# Altium PCB Pot_Rat.PcbDoc
Units mm, origin at the board's own origin, x right, y up, seen from the top; angles counter-clockwise.
Board outline 42.53 x 50.21 mm, 2 copper layers (Top Layer, Bottom Layer); 37 components, 18 nets, 134 pads, 64 vias.
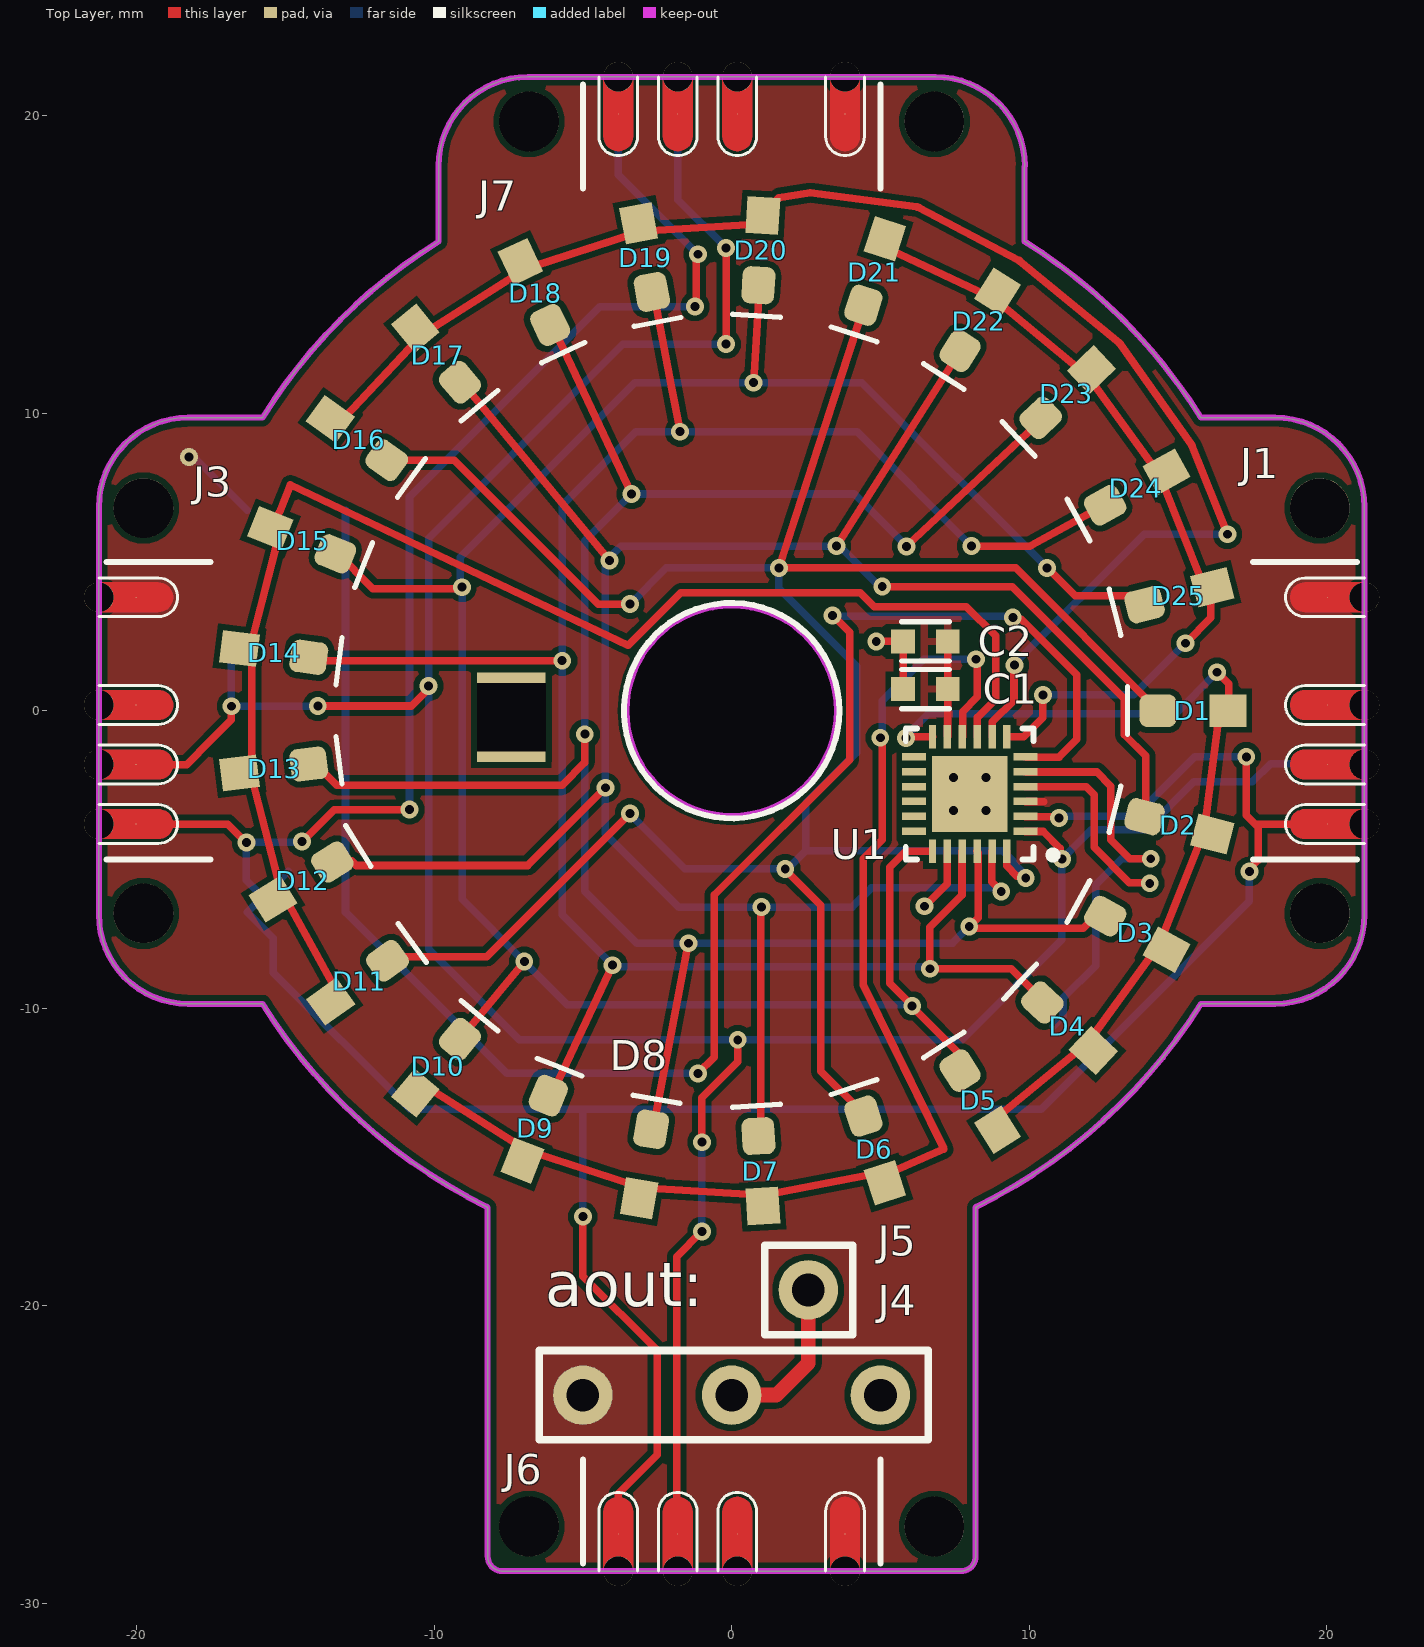
[diagram p0: Top Layer view]
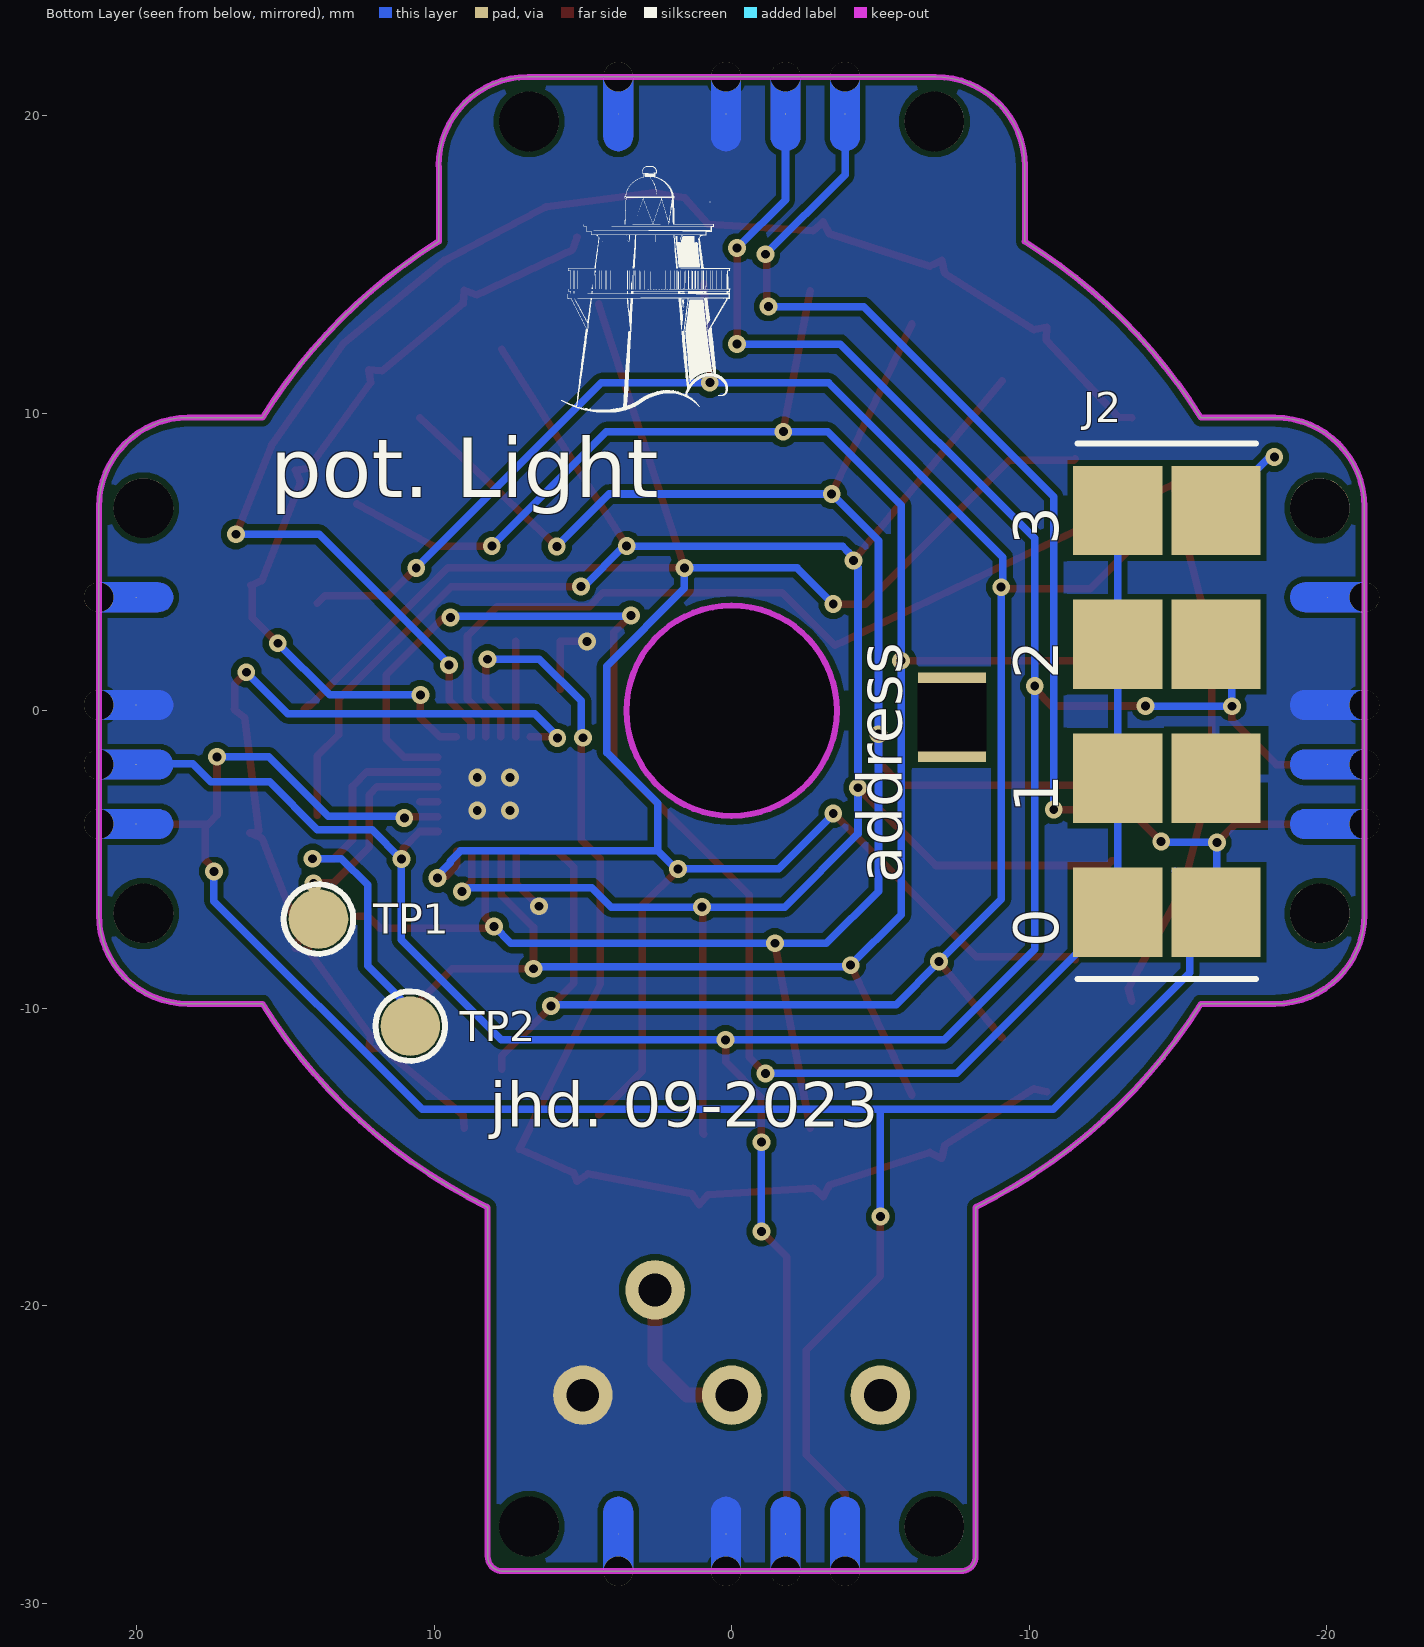
[diagram p1: Bottom Layer view, seen from below]

## Layer stack, top to bottom
Top Solder: solder mask 0.0102, Solder Resist, Dk 3.5
Top Layer: signal copper 0.0356
Dielectric 1: dielectric 0.32, FR-4, Dk 4.8
Bottom Layer: signal copper 0.0356
Bottom Solder: solder mask 0.0102, Solder Resist, Dk 3.5

## Board outline
-15.765,-9.851 ccw(c0,0) -8.233,-16.667 -8.2,-16.7 -8.2,-28.415 ccw(c-7.7,-28.415) -7.7,-28.915 7.7,-28.915 ccw(c7.7,-28.415) 8.2,-28.415 8.2,-16.7 8.233,-16.667 ccw(c0,0) 15.765,-9.851 18.265,-9.851 ccw(c18.265,-6.851) 21.265,-6.851 21.265,6.851 ccw(c18.265,6.851) 18.265,9.851 15.765,9.851 ccw(c0,0) 9.835,15.775 9.839,15.778 9.839,18.288 9.851,18.3 ccw(c6.851,18.3) 6.851,21.3 -6.851,21.3 ccw(c-6.851,18.3) -9.851,18.3 -9.851,15.775 -9.847,15.768 ccw(c0,0) -15.765,9.851 -18.265,9.851 ccw(c-18.265,6.851) -21.265,6.851 -21.265,-6.851 ccw(c-18.265,-6.851) -18.265,-9.851
cut-out: -3.536,0 ccw(c0,0) 0,-3.536 ccw(c0,0) 3.536,0 ccw(c0,0) 0,3.536 ccw(c0,0)

## Design rules (kind name [scope] priority, off if disabled: settings)
Clearance [All] p1: gap=0.2 ignorepadtopadclearanceinfootprint=FALSE
HoleSize [All] p1: absolutevalues=TRUE maxlimit=10 minlimit=0.025 maxpercent=80.000 minpercent=20.000
MinimumSolderMaskSliver [All] p1: minsoldermaskwidth=0.001
PolygonConnect [All] p1: thpad.connectstyle=Direct thpad.reliefconductorwidth=0.254 thpad.reliefentries=4 thpad.polygonreliefangle="90 Angle" thpad.airgapwidth=0.254 smdpad.connectstyle=Relief smdpad.reliefconductorwidth=0.254 smdpad.reliefentries=4 smdpad.polygonreliefangle="90 Angle" smdpad.airgapwidth=0.254 via.connectstyle=Direct via.reliefconductorwidth=0.254 via.reliefentries=4 via.polygonreliefangle="90 Angle" via.airgapwidth=0.254
PolygonConnect PolygonConnect_1 [All vs InNet('GND')] p2: thpad.connectstyle=Direct thpad.reliefconductorwidth=0.254 thpad.reliefentries=4 thpad.polygonreliefangle="90 Angle" thpad.airgapwidth=0.254 smdpad.connectstyle=Relief smdpad.reliefconductorwidth=0.254 smdpad.reliefentries=4 smdpad.polygonreliefangle="90 Angle" smdpad.airgapwidth=0.254 via.connectstyle=Relief via.reliefconductorwidth=0.254 via.reliefentries=4 via.polygonreliefangle="90 Angle" via.airgapwidth=0.254
RoutingVias [All] p1: holewidth=0.711 width=1.27 viastyle="Through Hole" minholewidth=0.3 minwidth=0.6 maxholewidth=0.711 maxwidth=1.27
SilkToSilkClearance [All] p1: silktosilkclearance=0.168
SolderMaskExpansion [All] p1: expansion=0.102 istentingtop=FALSE
Width [All] p1: maxlimit=1 minlimit=0.254 preferedwidth=0.254
27 further rules are at their usual default settings.

## Components (designator, comment, footprint, x,y, rotation, side; value= is the part's Value field where it differs from the comment)
C1 "CAP" CAP_0603 6.51,0.729 r0 top value=1uF
C2 "CAP" CAP_0603 6.51,2.329 r0 top value=100nF
D1 "LED" LED_0805 15.501,0.001 r0.01 top
D2 "LED" LED_0805 15.013,-3.855 r345.6 top
D3 "LED" LED_0805 13.583,-7.467 r331.2 top
D4 "LED" LED_0805 11.299,-10.61 r316.8 top
D5 "LED" LED_0805 8.305,-13.087 r302.4 top
D6 "LED" LED_0805 4.79,-14.741 r288 top
D7 "LED" LED_0805 0.973,-15.469 r273.6 top
D8 "LED" LED_0805 -2.905,-15.225 r260.14 top
D9 "LED" LED_0805 -6.596,-14.026 r248.4 top
D10 "LED" LED_0805 -9.88,-11.943 r230.4 top
D11 "LED" LED_0805 -12.518,-9.091 r215.8 top
D12 "LED" LED_0805 -14.415,-5.709 r211.92 top
D13 "LED" LED_0805 -15.378,-1.943 r187.2 top
D14 "LED" LED_0805 -15.378,1.943 r172.8 top
D15 "LED" LED_0805 -14.412,5.706 r158.4 top
D16 "LED" LED_0805 -12.54,9.111 r144 top
D17 "LED" LED_0805 -9.88,11.943 r129.6 top
D18 "LED" LED_0805 -6.6,14.025 r115.2 top
D19 "LED" LED_0805 -2.904,15.225 r100.8 top
D20 "LED" LED_0805 0.973,15.469 r86.4 top
D21 "LED" LED_0805 4.79,14.741 r72 top
D22 "LED" LED_0805 8.305,13.087 r57.6 top
D23 "LED" LED_0805 11.239,10.649 r43.46 top
D24 "LED" LED_0805 13.582,7.467 r28.8 top
D25 "LED" LED_0805 15.013,3.855 r14.4 top
J1 "Castellated_Pads_04x01" 04X01_Castellated_Pad_1MM#1 20.015,-3.81 r90 top
J2 "ADDRESS-4LVL" ADDRESS-4LVL -12.976,-6.77 r90 bottom
J3 "Castellated_Pads_04x01" 04X01_Castellated_Pad_1MM#2 -20.015,-3.81 r90 top
J4 "Pin_Header_03x01" 03x01_Header_5mm_MAL_DOWN -5,-23 r0 top locked
J5 "Pin_Header_01x01" 01x01_Header_2.54mm_MAL 2.574,-19.464 r0 top
J6 "Castellated_Pads_04x01" 04X01_Castellated_Pad_1MM#1 -3.81,-27.665 r0 top
J7 "Castellated_Pads_04x01" 04X01_Castellated_Pad_1MM#2 -3.81,20.05 r0 top
TP1 "Testpoint 2mm" TESTPOINT 13.884,-7.001 r180 bottom
TP2 "Testpoint 2mm" TESTPOINT 10.8,-10.6 r180 bottom
U1 "IS31FL3728" QFN50P395X400X80_HS-25N 9.875,-4.05 r180 top

## Footprints (in the part's own frame and the unit in brackets; to place one, negate y for a bottom-side part, rotate by r counter-clockwise, add the part's x,y. Pads: shape width x height; smd on the part's side, far side on the other; paste and mask are expansions set on the pad)
01x01_Header_2.54mm_MAL [mm]
  round 2 hole 1.1: 1(0,0)
  silkscreen extent -1.46,-1.5 1.5,1.5
03x01_Header_5mm_MAL_DOWN [mm]
  round 2 hole 1.1: 1(0,0) 2(5,0) 3(10,0)
  silkscreen extent -1.46,-1.5 11.6,1.5, body extent -1.25,-0.37 11.33,12.05, height 2.25
04X01_Castellated_Pad_1MM#1 [mm]
  round 0.025 all layers, no hole: 1(0,0) 2(2,0) 3(4,0) 4(7.62,0)
  round 2 hole 2: ""(-3,0.25) ""(10.62,0.25)
  round 1 hole 1: ""(0,-1.25) ""(2,-1.25) ""(4,-1.25) ""(7.62,-1.25)
  Top Layer region: 7.12,-1.25 8.12,-1.25 8.12,0.75 8.07,0.967 7.932,1.141 7.731,1.237 7.509,1.237 7.308,1.141 7.17,0.967 7.12,0.75 7.12,0.75
  Top Layer region: 3.5,-1.25 4.5,-1.25 4.5,0.75 4.45,0.967 4.312,1.141 4.111,1.237 3.889,1.237 3.688,1.141 3.55,0.967 3.5,0.75 3.5,0.75
  Top Layer region: 1.5,-1.25 2.5,-1.25 2.5,0.75 2.45,0.967 2.312,1.141 2.111,1.237 1.889,1.237 1.688,1.141 1.55,0.967 1.5,0.75 1.5,0.75
  Top Layer region: -0.5,-1.25 0.5,-1.25 0.5,0.75 0.45,0.967 0.312,1.141 0.111,1.237 -0.111,1.237 -0.312,1.141 -0.45,0.967 -0.5,0.75 -0.5,0.75
  Bottom Layer region: 7.12,-1.25 8.12,-1.25 8.12,0.75 8.07,0.967 7.932,1.141 7.731,1.237 7.509,1.237 7.308,1.141 7.17,0.967 7.12,0.75 7.12,0.75
  Bottom Layer region: 3.5,-1.25 4.5,-1.25 4.5,0.75 4.45,0.967 4.312,1.141 4.111,1.237 3.889,1.237 3.688,1.141 3.55,0.967 3.5,0.75 3.5,0.75
  Bottom Layer region: 1.5,-1.25 2.5,-1.25 2.5,0.75 2.45,0.967 2.312,1.141 2.111,1.237 1.889,1.237 1.688,1.141 1.55,0.967 1.5,0.75 1.5,0.75
  Bottom Layer region: -0.5,-1.25 0.5,-1.25 0.5,0.75 0.45,0.967 0.312,1.141 0.111,1.237 -0.111,1.237 -0.312,1.141 -0.45,0.967 -0.5,0.75 -0.5,0.75
  silkscreen extent -1.19,-1.25 8.81,2.5
04X01_Castellated_Pad_1MM#2 [mm]
  round 0.025 all layers, no hole: 1(0,0) 2(2,0) 3(4,0) 4(7.62,0)
  round 2 hole 2: ""(-3,-0.25) ""(10.62,-0.25)
  round 1 hole 1: ""(0,1.25) ""(2,1.25) ""(4,1.25) ""(7.62,1.25)
  Top Layer region: -0.5,1.25 0.5,1.25 0.5,-0.75 0.45,-0.967 0.312,-1.141 0.111,-1.237 -0.111,-1.237 -0.312,-1.141 -0.45,-0.967 -0.5,-0.75 -0.5,-0.75
  Top Layer region: 1.5,1.25 2.5,1.25 2.5,-0.75 2.45,-0.967 2.312,-1.141 2.111,-1.237 1.889,-1.237 1.688,-1.141 1.55,-0.967 1.5,-0.75 1.5,-0.75
  Top Layer region: 3.5,1.25 4.5,1.25 4.5,-0.75 4.45,-0.967 4.312,-1.141 4.111,-1.237 3.889,-1.237 3.688,-1.141 3.55,-0.967 3.5,-0.75 3.5,-0.75
  Top Layer region: 7.12,1.25 8.12,1.25 8.12,-0.75 8.07,-0.967 7.932,-1.141 7.731,-1.237 7.509,-1.237 7.308,-1.141 7.17,-0.967 7.12,-0.75 7.12,-0.75
  Bottom Layer region: -0.5,1.25 0.5,1.25 0.5,-0.75 0.45,-0.967 0.312,-1.141 0.111,-1.237 -0.111,-1.237 -0.312,-1.141 -0.45,-0.967 -0.5,-0.75 -0.5,-0.75
  Bottom Layer region: 1.5,1.25 2.5,1.25 2.5,-0.75 2.45,-0.967 2.312,-1.141 2.111,-1.237 1.889,-1.237 1.688,-1.141 1.55,-0.967 1.5,-0.75 1.5,-0.75
  Bottom Layer region: 3.5,1.25 4.5,1.25 4.5,-0.75 4.45,-0.967 4.312,-1.141 4.111,-1.237 3.889,-1.237 3.688,-1.141 3.55,-0.967 3.5,-0.75 3.5,-0.75
  Bottom Layer region: 7.12,1.25 8.12,1.25 8.12,-0.75 8.07,-0.967 7.932,-1.141 7.731,-1.237 7.509,-1.237 7.308,-1.141 7.17,-0.967 7.12,-0.75 7.12,-0.75
  silkscreen extent -1.19,-2.5 8.81,1.25
ADDRESS-4LVL [mm]
  rect 3x3 smd paste-2539.97: 1(0,0) 1(4.5,0) 1(9,0) 1(13.5,0) 2(0,-3.3) 3(4.5,-3.3) 4(9,-3.3) 5(13.5,-3.3)
  silkscreen extent -2.25,-4.65 15.75,1.35
CAP_0603 [mm]
  rect 0.8x0.8 smd: 1(-0.75,0) 2(0.75,0)
  silkscreen extent -0.8,-0.66 0.8,0.66, body extent -0.8,-0.45 0.8,0.45, height 0.6
LED_0805 [mm]
  rrect50% 1.25x1.1 smd: 1(-1.175,0)
  rect 1.25x1.1 smd: 2(1.175,0)
  silkscreen extent -2.2,-0.8 -2.2,0.8, body extent -1,-0.63 1,0.62, height 0.81
QFN50P395X400X80_HS-25N [mm] "QFN, 24-Leads, Body 3,95x4,00mm, Pitch 0,50mm, Thermal Pad 2,55x2,55mm, IPC Medium Density"
  rect 0.8x0.25 smd: 1(0,0) 2(0,-0.5) 3(0,-1) 4(0,-1.5) 5(0,-2) 6(0,-2.5) 13(3.75,-2.5) 14(3.75,-2) 15(3.75,-1.5) 16(3.75,-1) 17(3.75,-0.5) 18(3.75,0)
  rect 0.25x0.8 smd: 7(0.625,-3.175) 8(1.125,-3.175) 9(1.625,-3.175) 10(2.125,-3.175) 11(2.625,-3.175) 12(3.125,-3.175) 19(3.125,0.675) 20(2.625,0.675) 21(2.125,0.675) 22(1.625,0.675) 23(1.125,0.675) 24(0.625,0.675)
  rect 2.55x2.55 smd: 25(1.875,-1.25)
  silkscreen extent -1.05,-3.45 4.03,0.95, body extent -0.13,-3.3 3.88,0.8, height 0.8
TESTPOINT [mm]
  round 2 smd paste-10: 1(0,0)
  silkscreen extent -1.17,-1.17 1.17,1.17

## Part data
D1 D2 D3 D4 D5 D6 D7 D8 D9 D10 D11 D12 D13 D14 D15 D16 D17 D18 D19 D20 D21 D22 D23 D24 D25: Manufacturer="ROHM Semiconductor", Manufacturer Number=SMLMN2WB1CW1
U1: "8x8 IIC Led Driver", Manufacturer=ISSI, Manufacturer Number=IS31FL3728

## Free pads (board coordinates)
  rect 2.3x3 hole 2.3 square: H(-7.405,-0.22)

## Via types
v1: diameter 0.6, hole 0.3, Top Layer to Bottom Layer, tented both sides, 64 vias

## Nets (pads, with @x,y where several pads share a name; then routed paths per layer and width w, separated by ;. In a path a pad name is that pad's centre, name@x,y a point inside that pad or via, vN(x,y) a via of type N, cw(c..) or ccw(c..) an arc to the next point about the centre after c; other vN are vias at no path point)
+3.3V: C1.2 C2.2 J1.4 J2.5 J3.4 J4.1 J6.4 J7.4 U1.3 U1.11 | length 6.5
  Top Layer w0.254: U1.11@7.26,-0.871 C1.2 C2.2 ; U1.3@9.874,-3.06 10.481,-3.06
  Bottom Layer w0.254: v1(-18.235,8.52) -18.169,8.454 -18.001,8.454 J2.5
AD: J2.1 U1.6 | length 58.5
  Top Layer w0.254: v1(-1.135,-12.19) -0.59,-11.645 -0.59,-6.193 3.963,-1.641 3.963,2.635 3.397,3.201 v1(3.385,3.201) ; v1(9.448,3.135) 9.514,3.069 9.737,3.069 11.6,1.205 11.6,-0.96 11,-1.56 U1.6@9.881,-1.56
  Bottom Layer w0.254: J2.1@-12.976,6.73 -12.976,2.23 -12.976,-2.27 -12.976,-6.77 -7.557,-12.19 v1(-1.135,-12.19) ; v1(3.385,3.201) 3.416,3.171 9.412,3.171 v1(9.448,3.135)
C1: D1.1 D6.1 D11.1 D16.1 D21.1 U1.24 | length 86.7
  Top Layer w0.254: D11.1@-11.545,-8.376 -11.432,-8.263 -8.228,-8.263 v1(-3.415,-3.45) ; D16.1@-11.545,8.464 -11.501,8.42 -9.323,8.42 -4.483,3.58 v1(-3.415,3.58) ; v1(1.8,-5.317) 1.8,-5.341 3,-6.541 3,-12.109 D6.1@4.471,-13.58 ; D21.1@4.471,13.668 v1(1.589,4.799) 9.539,4.799 D1.1@14.176,0.162 ; U1.24@9.24,-4.731 9.24,-5.213 9.585,-5.558 9.817,-5.558 v1(9.883,-5.624) ; D1.1@14.213,0.2 D1.1@14.369,0.044
  Bottom Layer w0.254: v1(-3.415,-3.45) -3.415,-3.481 -1.579,-5.317 v1(1.8,-5.317) ; v1(-3.415,3.58) -2.196,4.799 v1(1.589,4.799) 1.589,4.11 4.2,1.499 4.2,-1.404 2.489,-3.115 2.489,-4.711 ; v1@1.8,-5.4 2.489,-4.711 ; v1(9.883,-5.624) 9.883,-5.53 9.458,-5.105 9.458,-5.058 9.111,-4.711 2.489,-4.711
C2: D2.1 D7.1 D12.1 D17.1 D22.1 U1.23 | length 82.3
  Top Layer w0.254: D12.1@-12.812,-5.046 -12.774,-5.046 -12.618,-5.202 -6.856,-5.202 v1(-4.245,-2.591) ; D17.1@-9.087,11.082 -8.77,10.698 v1(-4.099,5.052) ; D7.1@0.931,-14.24 0.971,-14.2 0.971,-6.629 v1(1,-6.6) ; v1(3.527,5.532) 7.453,11.719 D22.1@7.72,12.139 ; v1(5.06,4.172) 9.428,4.172 13.2,0.4 13.2,-0.8 13.919,-1.519 D2.1@13.919,-3.518 ; U1.23@8.74,-4.729 8.74,-5.752 v1(9.06,-6.071)
  Bottom Layer w0.254: v1(5.06,4.172) 4.973,4.172 3.627,5.519 3.597,5.519 3.597,5.532 -3.725,5.532 -3.926,5.331 -3.926,5.319 -4.099,5.146 -4.099,4.959 -4.245,4.813 -4.245,-4.14 -1.785,-6.6 v1(1,-6.6) 4.044,-6.6 4.7,-5.944 8.839,-5.944 8.966,-6.071 v1(9.06,-6.071)
C3: D3.1 D8.1 D13.1 D18.1 D23.1 U1.22 | length 75.1
  Top Layer w0.254: D13.1@-14.168,-1.751 -14.021,-1.751 -13.272,-2.5 -5.695,-2.5 -4.935,-1.74 v1(-4.935,-0.79) ; D18.1@-6.055,13.006 v1(-3.362,7.283) v1@-3.353,7.263 ; D8.1@-2.64,-14.027 v1(-1.455,-7.814) ; v1(5.876,5.52) D23.1@10.487,9.85 ; U1.22@8.24,-4.726 8.285,-4.771 8.285,-6.95 v1(7.985,-7.25) 8.047,-7.312 11.817,-7.312 12.228,-6.901 D3.1
  Bottom Layer w0.254: v1(5.876,5.52) 4.114,7.283 v1(-3.362,7.283) -4.935,5.71 -4.935,-6.065 -3.186,-7.814 7.421,-7.814 v1(7.985,-7.25)
C4: D4.1 D9.1 D14.1 D19.1 D24.1 U1.21 | length 75
  Top Layer w0.254: D14.1@-14.168,1.84 -14.008,1.68 v1(-5.695,1.68) ; D9.1@-6.055,-12.918 v1(-4.001,-8.552) ; D19.1@-2.635,14.112 -2.026,10.917 v1@-1.726,9.391 ; U1.21@7.74,-4.724 7.74,-6.194 6.66,-7.274 v1(6.66,-8.671) 9.396,-8.671 D4.1@10.487,-9.762 ; v1(8.06,5.529) 9.955,5.529 10.021,5.529 10.078,5.56 D24.1@12.597,6.945
  Bottom Layer w0.254: v1(6.66,-8.671) 6.6,-8.611 -3.941,-8.611 -5.695,-6.858 -5.695,6.905 -3.224,9.376 v1(-1.736,9.376) 4.213,9.376 v1(8.06,5.529)
C5: D5.1 D10.1 D15.1 D20.1 D25.1 U1.19 | length 77.4
  Top Layer w0.254: D15.1@-13.275,5.318 -12.053,4.096 -9.112,4.096 v1(-9.058,4.15) ; D10.1@-9.087,-10.993 -8.77,-10.61 v1(-6.968,-8.432) ; v1(0.735,11.022) 0.912,13.844 D20.1@0.944,14.341 ; U1.19@6.74,-4.719 5.854,-4.719 5.306,-5.267 5.306,-9.161 v1(6.067,-9.922) 6.067,-9.944 7.72,-11.596 D5.1@7.72,-12.051 ; v1(10.6,4.8) 11.543,3.857 13.669,3.857 D25.1@13.919,3.607
  Bottom Layer w0.254: v1@-9.115,4.207 -9.115,5.162 -3.254,11.022 v1(0.735,11.022) 4.378,11.022 v1(10.6,4.8) ; v1(-9.058,4.15) -9.058,-6.341 v1(-6.968,-8.432) -5.523,-9.876 6.021,-9.876 v1(6.067,-9.922)
GND: C1.1 C2.1 J1.3 J2.3 J3.3 J4.3 J6.3 J7.3 U1.20 U1.25 | length 4.7
  Top Layer w0.254: v1(4.86,2.329) C2.1 C1.1 ; v1(6.477,-6.571) 6.486,-6.571 7.24,-5.817 U1.20@7.24,-4.721
  other v1: 7.45,-3.35 8.55,-3.35 7.45,-2.25 8.55,-2.25
NetD1_2: D1.2 D2.2 D3.2 D4.2 D5.2 U1.12 | length 31.6
  Top Layer w0.254: v1(5.859,-0.914) 5.904,-0.869 U1.12@6.76,-0.869 ; D5.2@8.979,-14.035 9.024,-13.592 11.756,-11.332 12.2,-11.371 12.133,-10.931 14.217,-8.061 14.657,-7.989 14.482,-7.58 15.788,-4.282 16.195,-4.103 15.917,-4.066 15.889,-4.03 16.369,-0.231 16.719,0.044 16.702,0.062 16.702,0.898 v1(16.31,1.291)
  Bottom Layer w0.254: v1(5.859,-0.914) 5.859,-0.852 6.612,-0.098 14.921,-0.098 v1(16.31,1.291)
NetJ4_2: J4.2 J5.1 | length 5.5
  Top Layer w0.5: J4.2 1.5,-23 2.574,-21.926 J5.1
NetTP1_1: TP1.1 U1.4 | length 6.5
  Top Layer w0.254: U1.4@9.878,-2.561 11.919,-2.561 12.18,-2.822 12.18,-4.59 13.369,-5.779 14.029,-5.779 v1(14.05,-5.8)
NetTP2_1: TP2.1 U1.5 | length 14
  Top Layer w0.254: U1.5@9.879,-2.06 12.266,-2.06 12.74,-2.534 12.74,-4.34 13.376,-4.976 v1(14.083,-4.976)
  Bottom Layer w0.254: TP2.1 11.134,-10.266 11.134,-9.666 12.235,-8.565 12.235,-5.856 13.115,-4.976 v1(14.083,-4.976)
R1: D21.2 D22.2 D23.2 D24.2 D25.2 U1.7 | length 27.8
  Top Layer w0.254: D21.2@5.197,15.903 5.35,15.485 8.559,13.975 8.979,14.123 9.024,13.68 11.756,11.42 12.2,11.459 12.133,11.019 14.217,8.15 14.657,8.077 14.482,7.668 15.788,4.37 16.153,4.21 16.105,4.162 16.105,3.12 v1(15.252,2.267) ; U1.7@9.26,-0.881 9.814,-0.881 10.46,-0.235 v1(10.46,0.529)
  Bottom Layer w0.254: v1(10.46,0.529) 13.511,0.529 v1(15.252,2.267)
R2: D16.2 D17.2 D18.2 D19.2 D20.2 U1.8 | length 50.6
  Top Layer w0.254: D16.2@-13.446,9.845 -13.001,9.862 -10.574,12.447 -10.585,12.892 -10.15,12.798 -7.156,14.698 -7.056,15.132 -6.658,14.933 -3.285,16.028 -3.08,16.424 -2.745,16.131 0.795,16.354 1.091,16.686 1.584,17.238 2.644,17.412 6.214,16.932 cw(c6.18,16.68) 6.298,16.905 9.637,15.141 cw(c9.518,14.916) 9.679,15.113 13.033,12.35 cw(c12.872,12.154) 13.079,12.302 ; U1.8@8.76,-0.879 8.76,-0.371 9.488,0.357 v1@9.488,1.514 ; 13.079,12.301 15.443,8.953 cw(c15.235,8.807) 15.47,8.902 ; 15.471,8.901 v1(16.66,5.929) v1@16.66,6.022
  Bottom Layer w0.254: v1(9.504,1.529) 9.504,1.573 13.86,5.929 v1(16.66,5.929)
R3: D11.2 D12.2 D13.2 D14.2 D15.2 U1.9 | length 49.2
  Top Layer w0.254: D15.2@-15.236,5.798 -16.118,2.363 -16.499,2.134 -16.499,2.05 -16.127,1.678 -16.127,-1.432 -16.13,-1.435 -16.13,-1.676 -16.499,-2.046 -16.118,-2.275 -15.236,-5.71 -15.46,-6.094 -15.033,-6.221 -13.325,-9.329 D11.2@-13.446,-9.757 ; D15.2@-15.156,5.878 -15.46,6.183 -15.198,6.662 -14.83,7.592 -3.471,2.194 -1.702,3.963 4.324,3.963 4.787,3.5 7.889,3.5 8.877,2.512 8.877,0.388 8.26,-0.229 U1.9@8.26,-0.876
R4: D6.2 D7.2 D8.2 D9.2 D10.2 U1.10 | length 42.6
  Top Layer w0.254: D10.2@-10.585,-12.804 -10.15,-12.71 -7.156,-14.61 -7.056,-15.044 -6.658,-14.844 -3.285,-15.94 -3.08,-16.336 -2.745,-16.043 0.795,-16.266 1.091,-16.598 1.344,-16.231 4.827,-15.567 5.197,-15.815 5.301,-15.531 7.132,-14.73 4.417,-9.196 4.417,-4.983 5.06,-4.34 5.06,-0.973 v1(4.996,-0.909) ; U1.10@7.76,-0.874 7.76,-0.034 8.26,0.466 8.26,1.675 v1(8.206,1.729)
  Bottom Layer w0.254: v1(4.996,-0.909) 5.06,-0.844 5.06,0.329 6.46,1.729 v1(8.206,1.729)
SCL: J1.1 J2.2 J3.1 J6.1 J7.1 U1.2 | length 116.3
  Top Layer w0.254: -19.265,-3.81 -16.93,-3.81 v1(-16.305,-4.434) ; v1(-14.435,-4.4) -13.357,-3.322 v1(-10.825,-3.322) ; v1(-5,-17) -5,-19 -2.5,-21.5 -2.5,-25 -3.81,-26.31 -3.81,-27.81 ; v1(-1.234,13.58) -1.185,13.63 -1.185,15.29 v1(-1.135,15.34) ; U1.2@9.871,-3.56 10.96,-3.56 v1(11,-3.6) ; v1(17.295,-1.55) 17.295,-3.514 17.591,-3.81 ; v1(17.4,-5.4) 17.4,-5.306 17.69,-5.016 17.69,-3.909 17.591,-3.81 ; 19.735,-3.81 17.591,-3.81
  Bottom Layer w0.254: J2.2 J2.2@-15.753,-6.247 ; J2.2@-16.264,-6.783 -15.4,-7.647 -15.4,-8.8 -10.8,-13.4 -5,-13.4 ; J2.2@-14.903,-5.397 J2.2@-15.753,-6.247 ; v1@-14.435,-4.426 v1(-14.435,-4.4) -14.452,-4.417 -16.288,-4.417 v1(-16.305,-4.434) -16.305,-5.696 J2.2@-15.753,-6.247 ; v1(-10.825,-3.322) -10.825,7.19 -4.435,13.58 v1(-1.234,13.58) ; v1(-5,-17) -5,-13.4 ; -3.81,21.3 -3.81,18.015 v1(-1.135,15.34) ; v1(11,-3.6) 11.054,-3.546 13.559,-3.546 15.555,-1.55 v1(17.295,-1.55) ; v1(17.4,-5.4) 17.4,-6.4 10.4,-13.4 -5,-13.4
SDA: J1.2 J2.4 J3.2 J6.2 J7.2 U1.1 | length 106.1
  Top Layer w0.254: -19.765,-1.81 -18.31,-1.81 -17.5,-1 -17.5,-0.99 -16.813,-0.303 -16.813,0.149 v1(-16.811,0.151) ; v1(-13.908,0.158) -10.763,0.158 -10.185,0.736 v1(-10.185,0.829) ; -1.85,-27.31 -1.85,-18.35 v1(-1,-17.5) ; v1(-1,-14.5) -1,-13 0.206,-11.794 v1(0.206,-11.059) ; v1(-0.185,12.32) v1(-0.185,15.55) ; U1.1@9.869,-4.059 10.474,-4.059 11.033,-4.619 11.033,-4.92 v1(11.1,-4.986)
  Bottom Layer w0.254: J2.4 -16.811,1.695 v1(-16.811,0.151) -16.807,0.154 -13.911,0.154 v1(-13.908,0.158) ; -1.81,21.3 -1.81,17.175 v1(-0.185,15.55) ; v1(-1,-17.5) v1(-1,-14.5) ; v1(-0.185,12.32) -3.656,12.32 -10.185,5.791 v1(-10.185,0.829) -10.185,-8.015 -7.141,-11.059 v1(0.206,-11.059) 7.741,-11.059 11.1,-7.7 v1(11.1,-4.986) 12.086,-4 13.925,-4 15.53,-2.395 17.5,-2.395 18.112,-1.783 20.838,-1.783
pads on no net: J1. J3. J6. J7. U1.13 U1.14 U1.15 U1.16 U1.17 U1.18

## Polygon pours and split planes (outlines as drawn)
GND on Bottom Layer "GND_L02_P001" (solid, pour order 1): -15.765,-9.851 ccw(c0,0) -8.233,-16.667 -8.2,-16.7 -8.2,-28.415 ccw(c-7.7,-28.415) -7.7,-28.915 7.7,-28.915 ccw(c7.7,-28.415) 8.2,-28.415 8.2,-16.7 8.233,-16.667 ccw(c0,0) 15.765,-9.851 18.265,-9.851 ccw(c18.265,-6.851) 21.265,-6.851 21.265,6.851 ccw(c18.265,6.851) 18.265,9.851 15.765,9.851 ccw(c0,0) 9.835,15.775 9.839,15.778 9.839,18.288 9.851,18.3 ccw(c6.851,18.3) 6.851,21.3 -6.851,21.3 ccw(c-6.851,18.3) -9.851,18.3 -9.851,15.775 -9.847,15.768 ccw(c0,0) -15.765,9.851 -18.265,9.851 ccw(c-18.265,6.851) -21.265,6.851 -21.265,-6.851 ccw(c-18.265,-6.851) -18.265,-9.851
+3.3V on Top Layer "+3.3V_L01_P000" (solid, pour order 0): -15.765,-9.851 ccw(c0,0) -8.233,-16.667 -8.2,-16.7 -8.2,-28.415 ccw(c-7.7,-28.415) -7.7,-28.915 7.7,-28.915 ccw(c7.7,-28.415) 8.2,-28.415 8.2,-16.7 8.233,-16.667 ccw(c0,0) 15.765,-9.851 18.265,-9.851 ccw(c18.265,-6.851) 21.265,-6.851 21.265,6.851 ccw(c18.265,6.851) 18.265,9.851 15.765,9.851 ccw(c0,0) 9.835,15.775 9.839,15.778 9.839,18.288 9.851,18.3 ccw(c6.851,18.3) 6.851,21.3 -6.851,21.3 ccw(c-6.851,18.3) -9.851,18.3 -9.851,15.775 -9.847,15.768 ccw(c0,0) -15.765,9.851 -18.265,9.851 ccw(c-18.265,6.851) -21.265,6.851 -21.265,-6.851 ccw(c-18.265,-6.851) -18.265,-9.851

## Keep-outs
Keep-Out Layer:
  circle w0.2: c0,0 r3.536
  lines w0.2: -9.851,15.775 -9.851,18.3 cw(c-6.851,18.3) -6.851,21.3 6.851,21.3 cw(c6.851,18.3) 9.851,18.3 9.839,18.288 9.839,15.778 9.835,15.775 cw(c0,0) 15.765,9.851 18.265,9.851 cw(c18.265,6.851) 21.265,6.851 21.265,-6.851 cw(c18.265,-6.851) 18.265,-9.851 15.765,-9.851 cw(c0,0) 8.233,-16.667 ; -9.847,15.768 ccw(c0,0) -15.765,9.851 -18.265,9.851 ccw(c-18.265,6.851) -21.265,6.851 -21.265,-6.851 ccw(c-18.265,-6.851) -18.265,-9.851 -15.765,-9.851 ccw(c0,0) -8.233,-16.667 ; -8.2,-16.7 -8.2,-17.2 -8.2,-28.415 ccw(c-7.7,-28.415) -7.7,-28.915 7.7,-28.915 ccw(c7.7,-28.415) 8.2,-28.415 8.2,-17.105 8.2,-16.7

## Silkscreen, mask and mechanical layers (free items; w line width, h text height)
Top Overlay:
  circle w0.2: c0,0 r3.621
  text "aout:" at -6.256,-20.016 h1.5
Bottom Overlay:
  drawing of 11 lines, arcs and shapes, not listed
  text "pot. Light" at 15.5,7.166 h2
  text "jhd. 09-2023" at 8.124,-13.982 h1.5

## Text inside footprints (layer, text, board x,y; h text height)
J2: Bottom Overlay "0" at -10.976,-7.945 h1.5 r270; Bottom Overlay "2" at -10.976,1.055 h1.5 r270; Bottom Overlay "address" at -5.718,-5.797 h1.5 r270; Bottom Overlay "1" at -10.976,-3.445 h1.5 r270; Bottom Overlay "3" at -10.976,5.555 h1.5 r270